# Altium PCB PCB.PcbDoc (part 2 of 2)
Units mil, origin at the board's own origin, x right, y up, seen from the top; angles counter-clockwise.
Board outline 3920 x 1470 mil, 2 copper layers (Top Layer, Bottom Layer), stack 60.433 mil thick; 97 components, 79 nets, 353 pads, 366 vias.
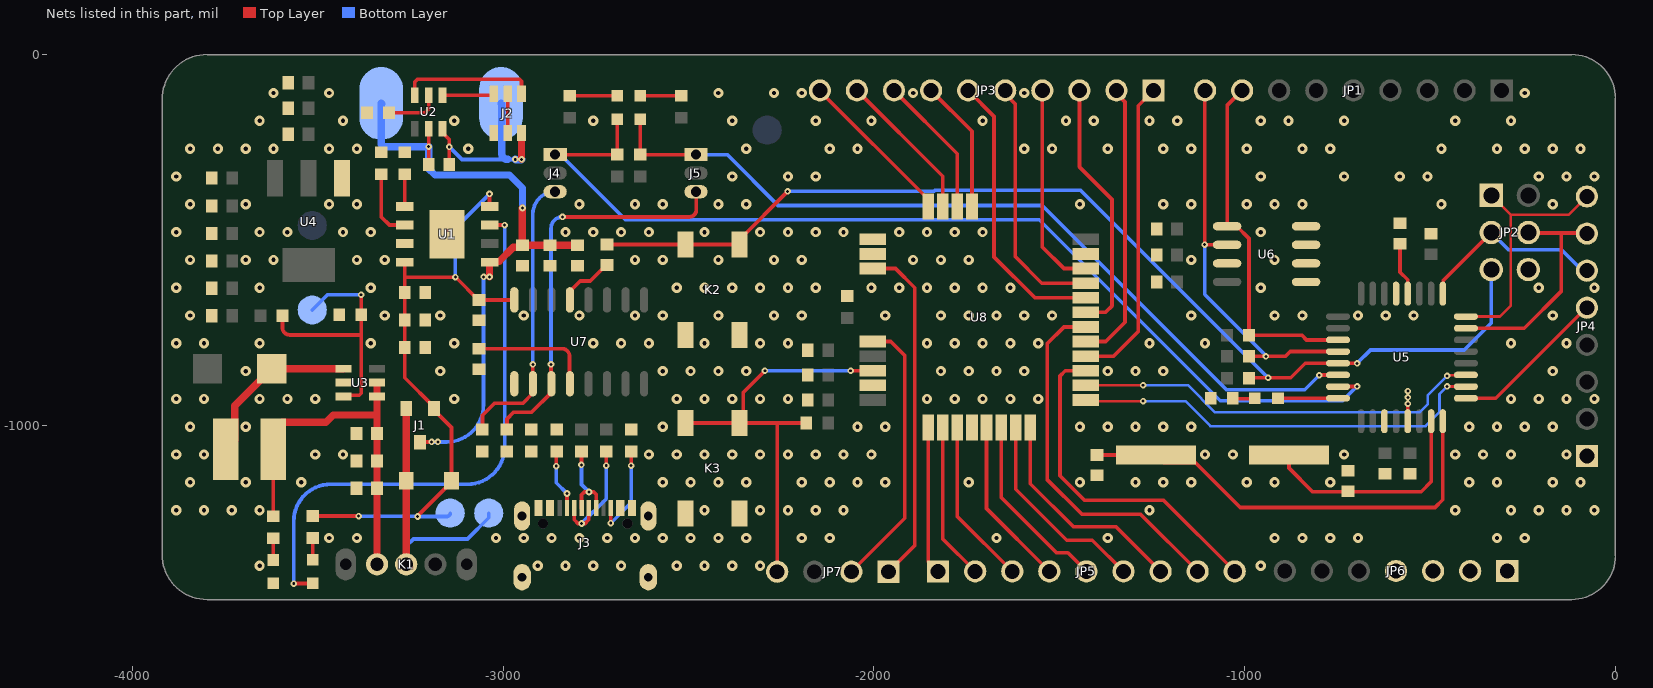
[diagram p2: the nets of this part, all layers, seen from the top]

## Via types
v1: diameter 27.56, hole 11.81, Top Layer to Bottom Layer, tented both sides, 309 vias
v2: diameter 17.72, hole 7.87, Top Layer to Bottom Layer, tented both sides, 57 vias

## Nets (pads, with @x,y where several pads share a name; then routed paths per layer and width w, separated by ;. In a path a pad name is that pad's centre, name@x,y a point inside that pad or via, vN(x,y) a via of type N, cw(c..) or ccw(c..) an arc to the next point about the centre after c; other vN are vias at no path point) (continued)
GND: C1.2 C2.2 C3.2 C4.2 C5.2 C6.2 C8.2 C9.2 C10.2 C11.2 C12.2 C13.2 C14.2 C15.2 C16.2 C17.2 C18.2 C19.2 C20.2 C21.2 C23.2 C24.2 C25.2 C26.2 C27.2 C28.2 C30.2 C31.2 C32.2 C33.2 C34.2 C35.2 D3.1 J2.1 J3.1 J3.12 J3.13 J3.14 JP2.4 JP4.1 JP6.1 JP6.2 JP6.3 JP6.4 K2.1 K2.3 K3.1 K3.3 R2.1 R3.1 R4.1 R5.1 R8.1 R9.2 R10.2 R14.2 R23.1 U1.3 U1.9 U3.2 U4.1 U5.3 U5.5 U5.21 U6.1 U6.2 U6.3 U6.4 U6.7 U7.1 U8.11 U8.17 U8.18 U8.23 U8.28 | length 48.9
  Top Layer w10: v2@-560.37,-942.14 -560.24,-942 v2(-560,-942) -560.25,-942.25 U5.5@-560.25,-989
  Bottom Layer w10: v2@-561,-941 v2(-560,-942)
  other v1: -3657,-1378.95 -2907,-1378.95 -2832,-1378.95 -2757,-1378.95 -2682,-1378.95 -2532,-1378.95 -2457,-1378.95 -2382,-1378.95 -2307,-1378.95 -957,-1378.95 -3469.5,-1303.95 -3394.5,-1303.95 -3019.5,-1303.95 -2944.5,-1303.95 -2869.5,-1303.95 -2794.5,-1303.95 -2719.5,-1303.95 -2644.5,-1303.95 -2569.5,-1303.95 -2494.5,-1303.95 -2419.5,-1303.95 -2344.5,-1303.95 -2194.5,-1303.95 -2119.5,-1303.95 -1669.5,-1303.95 -1369.5,-1303.95 -919.5,-1303.95 -844.5,-1303.95 -769.5,-1303.95 -694.5,-1303.95 -319.5,-1303.95 -244.5,-1303.95 -3882,-1228.95 -3807,-1228.95 -3732,-1228.95 -3657,-1228.95 -2457,-1228.95 -2307,-1228.95 -2232,-1228.95 -2157,-1228.95 -2082,-1228.95 -1257,-1228.95 -432,-1228.95 -282,-1228.95 -207,-1228.95 -132,-1228.95 -57,-1228.95 -3844.5,-1153.95 -3694.5,-1153.95 -3544.5,-1153.95 -2569.5,-1153.95 -2494.5,-1153.95 -2419.5,-1153.95 -2344.5,-1153.95 -2194.5,-1153.95 -2119.5,-1153.95 -2044.5,-1153.95 -1969.5,-1153.95 -1744.5,-1153.95 -1444.5,-1153.95 -1294.5,-1153.95 -1219.5,-1153.95 -1144.5,-1153.95 -994.5,-1153.95 -919.5,-1153.95 -769.5,-1153.95 -394.5,-1153.95 -319.5,-1153.95 -169.5,-1153.95 -94.5,-1153.95 -3882,-1078.95 -3807,-1078.95 -3507,-1078.95 -3432,-1078.95 -2607,-1078.95 -2532,-1078.95 -2457,-1078.95 -2382,-1078.95 -2307,-1078.95 -2232,-1078.95 -2157,-1078.95 -2082,-1078.95 -2007,-1078.95 -1107,-1078.95 -1032,-1078.95 -732,-1078.95 -432,-1078.95 -357,-1078.95 -282,-1078.95 -132,-1078.95 -3844.5,-1003.95 -3694.5,-1003.95 -2569.5,-1003.95 -2044.5,-1003.95 -1969.5,-1003.95 -1444.5,-1003.95 -1369.5,-1003.95 -1294.5,-1003.95 -1219.5,-1003.95 -1144.5,-1003.95 -394.5,-1003.95 -319.5,-1003.95 -244.5,-1003.95 -169.5,-1003.95 -3882,-928.95 -3807,-928.95 -3657,-928.95 -3582,-928.95 -3507,-928.95 -3132,-928.95 -2532,-928.95 -2457,-928.95 -2382,-928.95 -2307,-928.95 -2232,-928.95 -1857,-928.95 -1782,-928.95 -1707,-928.95 -1632,-928.95 -1557,-928.95 -282,-928.95 -207,-928.95 -132,-928.95 -57,-928.95 -3694.5,-853.95 -3169.5,-853.95 -2569.5,-853.95 -2494.5,-853.95 -2419.5,-853.95 -2344.5,-853.95 -1819.5,-853.95 -1744.5,-853.95 -1669.5,-853.95 -1594.5,-853.95 -1369.5,-853.95 -1294.5,-853.95 -1219.5,-853.95 -169.5,-853.95 -3882,-778.95 -3807,-778.95 -3657,-778.95 -3357,-778.95 -3132,-778.95 -2757,-778.95 -2682,-778.95 -2607,-778.95 -2457,-778.95 -2307,-778.95 -2232,-778.95 -1857,-778.95 -1782,-778.95 -1707,-778.95 -1632,-778.95 -1557,-778.95 -1257,-778.95 -1107,-778.95 -282,-778.95 -132,-778.95 -3844.5,-703.95 -3319.5,-703.95 -3169.5,-703.95 -2944.5,-703.95 -2794.5,-703.95 -2644.5,-703.95 -2569.5,-703.95 -2419.5,-703.95 -2269.5,-703.95 -2194.5,-703.95 -1969.5,-703.95 -1819.5,-703.95 -1744.5,-703.95 -1669.5,-703.95 -1594.5,-703.95 -1519.5,-703.95 -1144.5,-703.95 -919.5,-703.95 -844.5,-703.95 -694.5,-703.95 -619.5,-703.95 -544.5,-703.95 -169.5,-703.95 -3882,-628.95 -3657,-628.95 -3357,-628.95 -2532,-628.95 -2457,-628.95 -2382,-628.95 -2307,-628.95 -2232,-628.95 -2157,-628.95 -2007,-628.95 -1932,-628.95 -1857,-628.95 -1782,-628.95 -1707,-628.95 -1632,-628.95 -957,-628.95 -207,-628.95 -57,-628.95 -3844.5,-553.95 -3694.5,-553.95 -3619.5,-553.95 -3394.5,-553.95 -3319.5,-553.95 -2644.5,-553.95 -2569.5,-553.95 -2419.5,-553.95 -2269.5,-553.95 -2194.5,-553.95 -1894.5,-553.95 -1819.5,-553.95 -1744.5,-553.95 -1144.5,-553.95 -919.5,-553.95 -3882,-478.95 -3657,-478.95 -3582,-478.95 -3432,-478.95 -3357,-478.95 -2832,-478.95 -2757,-478.95 -2682,-478.95 -2607,-478.95 -2457,-478.95 -2307,-478.95 -2232,-478.95 -2157,-478.95 -2082,-478.95 -1932,-478.95 -1857,-478.95 -1782,-478.95 -1707,-478.95 -957,-478.95 -3844.5,-403.95 -3694.5,-403.95 -3469.5,-403.95 -3394.5,-403.95 -2794.5,-403.95 -2644.5,-403.95 -2569.5,-403.95 -2419.5,-403.95 -2344.5,-403.95 -1444.5,-403.95 -1219.5,-403.95 -1144.5,-403.95 -994.5,-403.95 -919.5,-403.95 -844.5,-403.95 -469.5,-403.95 -169.5,-403.95 -3882,-328.95 -2382,-328.95 -2232,-328.95 -2157,-328.95 -957,-328.95 -732,-328.95 -582,-328.95 -507,-328.95 -207,-328.95 -132,-328.95 -57,-328.95 -3844.5,-253.95 -3769.5,-253.95 -3694.5,-253.95 -3619.5,-253.95 -3469.5,-253.95 -3394.5,-253.95 -3094.5,-253.95 -2344.5,-253.95 -2119.5,-253.95 -2044.5,-253.95 -1594.5,-253.95 -1519.5,-253.95 -1369.5,-253.95 -1219.5,-253.95 -1144.5,-253.95 -994.5,-253.95 -844.5,-253.95 -769.5,-253.95 -469.5,-253.95 -319.5,-253.95 -244.5,-253.95 -169.5,-253.95 -94.5,-253.95 -3657,-178.95 -3432,-178.95 -3132,-178.95 -2757,-178.95 -2382,-178.95 -2157,-178.95 -2007,-178.95 -1707,-178.95 -1482,-178.95 -1407,-178.95 -1257,-178.95 -1182,-178.95 -957,-178.95 -882,-178.95 -732,-178.95 -432,-178.95 -282,-178.95 -3619.5,-103.95 -3469.5,-103.95 -2419.5,-103.95 -2269.5,-103.95 -2194.5,-103.95 -1894.5,-103.95 -1594.5,-103.95 -244.5,-103.95
  other v2: -560,-925 -560,-908
MISO: JP2.1 JP4.8 U5.16 | length 678.2
  Top Layer w7: U5.16@-403.5,-706.76 -311.88,-706.76 -283,-677.89 -283,-432 ; JP2.1@-335,-380 -283,-432 ; JP4.8@-77,-383 -126,-432 -283,-432
MOSI: JP2.5 JP4.7 U5.15 | length 614.8
  Top Layer w10: U5.15@-403.5,-738.26 -246.26,-738.26 -146,-638 -146,-481.5 ; JP2.5@-235,-480 -233.5,-481.5 -146,-481.5 ; JP4.7@-77,-483 -78.5,-481.5 -146,-481.5
NetC7_2: C7.2 J2.3 SP2.1 U2.6 | length 547.5
  Top Layer w10: U2.6@-3163.6,-200.24 -3163.6,-210.87 -3145.44,-229.02 v2(-3145.44,-249) C7.2@-3145.44,-297 ; v2@-2967.78,-283.28 v2(-2967.5,-283) ; v2@-2950.6,-283 v2(-2950.5,-283) v2@-2950,-283
  Top Layer w20: v2@-2950.6,-283 J2.3@-2950.6,-212.15
  Bottom Layer w10: v2(-3145.44,-249) -3145,-249 -3145,-249.44 -3111.44,-283 -2988,-283 v2(-2967.5,-283)
  Bottom Layer w20: SP2.1@-3006,-132 cw(c-3006,-134) -3004,-134 -3004,-267 ccw(c-2988,-267) -2988,-283 ; v2(-2967.5,-283) -2966.5,-284 -2951.5,-284 v2(-2950.5,-283)
NetC20_1: C20.1 C22.2 U5.7 | length 619.5
  Top Layer w10: C22.2@-880.75,-1080 -880.75,-1115.25 -817,-1179 -524,-1179 -497.26,-1152.26 U5.7@-497.26,-989
NetC21_1: C21.1 C22.1 U5.8 | length 1211.6
  Top Layer w10: C21.1@-1398,-1080 C22.1@-1239.25,-1080 -1218.66,-1100.59 -1133.41,-1100.59 -1012,-1222 -487,-1222 -465.76,-1200.76 U5.8@-465.76,-989
NetC23_1: C23.1 U5.20 | length 143.1
  Top Layer w10: C23.1@-581,-510.56 -581,-587 -560.31,-607.69 U5.20@-560.25,-645 U5.20@-560.2,-645.06
NetC27_1: C27.1 U7.4 | length 330.4
  Top Layer w10: C27.1@-3065,-793.44 -2841.56,-793.44 cw(c-2841.56,-814) -2821,-814 -2821,-887.09 ccw(c-2820,-887.09) U7.4@-2820,-888.09
NetC29_1: C29.1 U7.13 | length 152.7
  Top Layer w10: U7.13@-2820,-661.91 -2820,-638.58 -2792.42,-611 -2765.41,-611 -2721.97,-567.56 C29.1@-2720,-567.56
NetD1_1: D1.1 U1.7 | length 1543.1
  Top Layer w10: v2(-3565,-1427) -3514.46,-1427 ccw(c-3514.46,-1425.94) D1.1@-3513.4,-1425.94 ; U1.7@-3036.75,-460 v2(-2996,-460)
  Bottom Layer w10: v2(-3565,-1427) -3565,-1259 cw(c-3465,-1259) -3465,-1159 -3096,-1159 ccw(c-3096,-1059) -2996,-1059 v2(-2996,-460)
NetD1_2: D1.2 R1.2 | length 58.9
  Top Layer w10: D1.2@-3513.68,-1362.99 R1.2@-3513.68,-1304.12
NetD2_2: D2.2 L1.2 U3.1 | length 462.2
  Top Layer w20: L1.2@-3748.1,-1065 -3723.65,-1040.55 -3723.65,-946.86 D2.2@-3624.38,-847.6 U3.1@-3430.79,-847.6
NetD3_2: D3.2 R7.2 | length 58.9
  Top Layer w10: D3.2@-3620.14,-1363.52 R7.2@-3620.14,-1304.66
NetD5_1: D5.1 R14.1 | length 58.9
  Top Layer w10: R14.1@-1032.07,-928.25 -973.34,-928.25 D5.1@-973.2,-928.38
NetD6_2: D6.2 R16.2 | length 110.3
  Top Layer w10: D6.2@-2630.28,-111.34 R16.2@-2520,-111.34
NetD7_2: D7.2 R17.2 | length 127.3
  Top Layer w10: R17.2@-2820,-111.34 D7.2@-2692.68,-111.34
NetJ2_2: J2.2 J2.5 | length 106.3
  Top Layer w10: J2.2@-2988,-212.15 J2.5@-2988,-105.85
NetJ2_4: J2.4 U2.3 | length 362.5
  Top Layer w10: U2.3@-3238.4,-109.76 -3238.4,-74.4 -3230.4,-66.4 -2956.46,-66.4 -2950.6,-72.26 J2.4@-2950.6,-105.85
NetJ2_6: J2.6 U2.1 | length 139.8
  Top Layer w10: U2.1@-3163.6,-109.76 -3029.32,-109.76 J2.6@-3025.4,-105.85
NetJ3_4: J3.4 R10.1 | length 164.4
  Top Layer w10: v2(-2857,-1110) -2857,-1071.89 R10.1@-2855.98,-1070.88 ; J3.4@-2827.99,-1222.87 v2(-2828,-1184)
  Bottom Layer w10: v2(-2857,-1110) -2857,-1155 v2(-2828,-1184)
NetJ3_5: J3.5 J3.7 R12.1 | length 337.7
  Top Layer w10: J3.5@-2808.31,-1222.87 -2808.31,-1254.69 -2798,-1265 v2(-2788.5,-1265) -2779,-1265 -2768.94,-1254.94 J3.7@-2768.94,-1222.87 ; v2(-2722.03,-1108.85) -2722,-1111 -2721.8,-1110.8 R12.1@-2721.8,-1070.88
  Bottom Layer w10: v2(-2788.5,-1265) -2722.03,-1198.53 v2(-2722.03,-1108.85)
NetJ3_6: J3.6 J3.8 R11.1 | length 234.4
  Top Layer w10: v2(-2789,-1107) -2788.73,-1106.73 R11.1@-2788.73,-1070.88 ; J3.6@-2788.62,-1222.87 -2788.62,-1187.62 -2781,-1180 v2(-2768.5,-1180) -2756,-1180 -2749.26,-1186.74 J3.8@-2749.26,-1222.87
  Bottom Layer w10: v2(-2789,-1107) -2789,-1159.5 v2(-2768.5,-1180)
NetJ3_10: J3.10 R9.1 | length 257.1
  Top Layer w10: v2(-2710,-1264) -2710,-1261 -2709.89,-1260.89 J3.10@-2709.89,-1222.87 ; v2(-2655,-1109) -2655,-1071.01 R9.1@-2654.87,-1070.88
  Bottom Layer w10: v2(-2710,-1264) -2655,-1209 v2(-2655,-1109)
NetR2_2: R2.2 U1.2 | length 187.4
  Top Layer w10: R2.2@-3328.8,-322.88 -3328.8,-438.2 -3307,-460 U1.2@-3265.75,-460
NetR4_2: R4.2 U1.1 | length 87
  Top Layer w10: R4.2@-3265.99,-323.09 -3265.75,-323.34 U1.1@-3265.75,-410
NetR5_2: R5.2 U2.2 | length 148.7
  Top Layer w10: R5.2@-3308.34,-157 -3211,-157 -3201,-147 U2.2@-3201,-109.76
NetR6_1: R6.1 R8.2 TP3.1 U3.3 | length 721.6
  Top Layer w10: R6.1@-3595.34,-704.46 -3595.34,-736.66 ccw(c-3575.66,-736.66) -3575.66,-756.34 -3383,-756.34 ; U3.3@-3430.79,-922.4 -3427.59,-919.2 -3388.86,-919.2 -3383,-913.34 -3383,-756.34 ; v2(-3383,-648) R8.2@-3383,-702 -3383,-756.34
  Bottom Layer w10: TP3.1@-3515,-689 -3474,-648 v2(-3383,-648)
PA0: JP5.4 U8.29 | length 458.2
  Top Layer w10: U8.29@-1696.31,-1005.98 -1696.31,-1224.69 JP5.4@-1527,-1394
PA1: JP5.8 U8.6 | length 997.4
  Top Layer w10: U8.6@-1429.09,-734.78 -1487.77,-734.78 -1533,-780 -1533,-1146 -1439,-1240 -1281,-1240 JP5.8@-1127,-1394
PA8: JP7.1 U8.19 | length 929.7
  Top Layer w10: U8.19@-2002.91,-577.3 -1941.7,-577.3 -1890,-629 -1890,-1324 JP7.1@-1961,-1395
PA9: JP7.2 U8.20 | length 744.2
  Top Layer w10: JP7.2@-2061,-1395 -1917,-1251 -1917,-812 -1954.85,-774.15 U8.20@-2002.91,-774.15
PA10: JP5.1 U8.25 | length 399.1
  Top Layer w10: U8.25@-1853.79,-1005.98 -1853.79,-1367.21 JP5.1@-1827,-1394
PA15: JP5.9 U8.3 | length 921.6
  Top Layer w10: U8.3@-1429.09,-852.89 -1483.89,-852.89 -1498,-867 -1498,-1136 -1432,-1202 -1219,-1202 JP5.9@-1027,-1394
PB2: JP5.2 U8.26 | length 424.2
  Top Layer w10: U8.26@-1814.42,-1005.98 -1814.42,-1306.58 JP5.2@-1727,-1394
PB3: JP5.7 U8.32 | length 600.9
  Top Layer w10: U8.32@-1578.2,-1005.98 -1578.2,-1157.8 -1462,-1274 -1347,-1274 JP5.7@-1227,-1394
PB4: JP5.6 U8.31 | length 548.8
  Top Layer w10: U8.31@-1617.57,-1005.98 -1617.57,-1172.43 -1480,-1310 -1411,-1310 JP5.6@-1327,-1394
PB5: JP5.5 U8.30 | length 501.4
  Top Layer w10: U8.30@-1656.94,-1005.98 -1656.94,-1195.06 -1508,-1344 -1477,-1344 JP5.5@-1427,-1394
PB12: JP5.3 U8.27 | length 449.3
  Top Layer w10: U8.27@-1775.05,-1005.98 -1775.05,-1245.95 JP5.3@-1627,-1394
RESET: C29.2 JP2.3 K2.2 K2.4 R18.1 U5.29 | length 2920.3
  Top Layer w10: C29.2@-2720,-512.44 K2.2@-2507.84,-512.44 K2.4@-2362.16,-512.44 -2362.16,-498.66 -2233,-369.5 v2(-2233,-369) ; R18.1@-988.18,-872.78 -987.15,-871.75 v2(-937,-871.75) -875.75,-871.75 -837,-833 v2(-697,-833)
  Bottom Layer w10: v2(-2233,-369) -1838.33,-369 -1835.33,-366 -1442.75,-366 v2(-937,-871.75) ; v2(-697,-833) -661,-797 -408.11,-797 -335,-723.89 JP2.3@-335,-580
RESET_RAK3172: JP7.4 K3.2 K3.4 R24.1 U8.22 | length 1172.7
  Top Layer w10: K3.2@-2497.84,-994 K3.4@-2352.16,-994 ; v2(-2294,-853) -2352.16,-911.16 K3.4@-2352.16,-994 ; JP7.4@-2261,-1395 -2261,-995 -2260,-994 ; R24.1@-2182.76,-994 -2260,-994 ; v2(-2063,-853) -2062.89,-852.89 U8.22@-2002.91,-852.89 ; K3.4@-2352.16,-994 -2260,-994
  Bottom Layer w10: v2(-2294,-853) v2(-2063,-853)
RESET_TFT: JP4.5 U5.9 | length 427.7
  Top Layer w10: U5.9@-403.5,-927.24 -323.24,-927.24 -79,-683 JP4.5@-77,-683
RXD_HV: J5.3 R21.2 U7.3 | length 1091.1
  Top Layer w10: R21.2@-2990,-1011.34 -2990,-983 -2972,-965 -2923.58,-965 -2870,-911.42 U7.3@-2870,-888.09 cw(c-2870,-887.09) -2871,-887.09 v2(-2871,-836) ; v2(-2840,-438) -2498,-438 ccw(c-2498,-419) -2479,-419 -2479,-371 ccw(c-2480,-371) J5.3@-2480,-370
  Bottom Layer w10: v2(-2871,-836) -2871,-469 cw(c-2840,-469) v2(-2840,-438)
RXD_LV: D7.1 J4.1 R20.2 U5.31 | length 2769.3
  Top Layer w10: J4.1@-2860,-270 R20.2@-2692.41,-270 D7.1@-2692.41,-174.29 ; U5.31@-748.5,-895.74 -748.13,-895.37 -697.37,-895.37 v2(-697,-895)
  Bottom Layer w10: J4.1@-2860,-270 -2846.22,-270 -2670.22,-446 -1554,-446 -1066,-934 -736,-934 v2(-697,-895)
RXD_RAK3172: U5.10 U8.1 | length 1128.3
  Top Layer w7: U8.1@-1429.09,-931.62 -1425.72,-935 v2(-1274,-935) ; v2(-454,-895) -453.63,-895.37 -403.87,-895.37 U5.10@-403.5,-895.74
  Bottom Layer w7: v2(-1274,-935) -1159.61,-935 -1092.2,-1002.4 -512.56,-1002.4 -474.62,-964.47 -474.62,-915.62 v2(-454,-895)
S1_MISO_RAK: JP3.8 U8.14 | length 383.8
  Top Layer w10: JP3.8@-1945.91,-97.02 -1775.06,-267.88 U8.14@-1775.06,-410.02
S1_MOSI_RAK: JP3.7 U8.13 | length 358.7
  Top Layer w10: JP3.7@-1845.91,-97.02 -1735.69,-207.25 U8.13@-1735.69,-410.02
S1_NSS_RAK: JP3.10 U8.16 | length 434
  Top Layer w10: JP3.10@-2145.91,-97.02 -2145.91,-98.22 -1853.8,-390.34 U8.16@-1853.8,-410.02
S1_SCK_RAK: JP3.9 U8.15 | length 408.9
  Top Layer w10: JP3.9@-2045.91,-97.02 -1814.43,-328.51 U8.15@-1814.43,-410.02
SCK: JP2.2 JP4.6 U5.17 | length 504.8
  Top Layer w10: U5.17@-465.76,-630 -464.29,-628.52 -464.29,-609.29 JP2.2@-335,-480
  Bottom Layer w10: JP2.2@-335,-480 -288,-527 -145,-527 -89,-583 JP4.6@-77,-583
SCL: JP1.9 R13.2 U5.28 U6.6 | length 1092.4
  Top Layer w10: JP1.9@-1107,-97 -1107.5,-97.5 -1107.5,-512.5 v2(-1108,-513) -1107.59,-513.41 U6.6@-1047.5,-513.41 ; R13.2@-988.18,-813.78 -942.76,-813.78 -889.78,-813.78 -877.25,-801.25 U5.28@-748.5,-801.25
  Bottom Layer w10: v2(-1108,-513) -1108,-647 -942.76,-812.24 v2(-942.76,-814.27) ; JP1.9@-1107.5,-97.5 JP1.9@-1107,-97
SCL_RAK: JP3.5 U8.9 | length 678.7
  Top Layer w10: JP3.5@-1645.91,-97.02 -1645.91,-106.72 -1619,-133.64 -1619,-545 -1547.34,-616.66 U8.9@-1429.09,-616.66
SDA: JP1.8 R15.2 U5.27 U6.5 | length 961.6
  Top Layer w10: JP1.8@-1007,-97 -1047.5,-137.5 U6.5@-1047.5,-463.41 -1021.59,-463.41 -988.73,-496.27 -988.73,-756.68 R15.2@-988.18,-757.23 -845.77,-757.23 -833.24,-769.76 U5.27@-748.5,-769.76
SDA_RAK: JP3.4 U8.10 | length 563
  Top Layer w10: JP3.4@-1545.91,-97.02 -1545.91,-519.09 -1487.7,-577.3 U8.10@-1429.09,-577.3
SWCLK_RAK: JP3.6 U8.8 | length 770.4
  Top Layer w10: JP3.6@-1745.91,-97.02 -1676,-166.94 -1676,-546 -1565.97,-656.03 U8.8@-1429.09,-656.03
SWDIO_RAK: JP3.3 U8.7 | length 695.7
  Top Layer w10: JP3.3@-1445.91,-97.02 -1445.91,-303.09 -1358,-391 -1358,-678 -1375.4,-695.41 U8.7@-1429.09,-695.41
"TOGGLE LED": D5.2 U5.32 | length 161.8
  Top Layer w10: D5.2@-910.25,-927.24 U5.32@-748.5,-927.24
TXD_HV: J4.3 R19.2 U7.2 | length 776.8
  Top Layer w10: R19.2@-3056,-1011.34 -3056,-973 -3024,-941 -2947.42,-941 -2920,-913.58 U7.2@-2920,-888.09 v2(-2920,-836)
  Bottom Layer w10: v2(-2920,-836) -2920,-430 cw(c-2860,-430) J4.3@-2860,-370
TXD_LV: D6.1 J5.1 R22.2 U5.30 | length 2256.3
  Top Layer w10: D6.1@-2630,-174.29 R22.2@-2630,-270 J5.1@-2480,-270 ; v2(-799,-865) -798.62,-864.62 -748.88,-864.62 U5.30@-748.5,-864.24
  Bottom Layer w10: J5.1@-2480,-270 -2396,-270 -2259,-407 -1546,-407 -1049,-904 -838,-904 v2(-799,-865)
TXD_RAK3172: U5.11 U8.2 | length 1111.9
  Top Layer w7: U8.2@-1429.09,-892.26 -1274.26,-892.26 v2(-1274,-892) ; v2(-454,-866.86) -452.69,-865.55 -404.81,-865.55 U5.11@-403.5,-864.24
  Bottom Layer w7: v2(-1274,-892) -1153,-892 -1079.62,-965.38 -528.76,-965.38 -506.12,-942.74 -506.12,-918.98 v2(-454,-866.86)
U1_TXD_RAK: JP3.1 U8.4 | length 836.6
  Top Layer w10: U8.4@-1429.09,-813.51 -1353.52,-813.51 -1287,-747 -1287,-138.11 JP3.1@-1245.91,-97.02
U2_RXD_RAK: JP3.2 U8.5 | length 762.2
  Top Layer w10: U8.5@-1429.09,-774.14 -1375.15,-774.14 -1323,-722 -1323,-127.8 -1345.91,-104.89 JP3.2@-1345.91,-97.02
V-BAT: C4.1 C5.1 C6.1 C7.1 J1.3 SP1.1 U1.5 U2.5 | length 1697.8
  Top Layer w10: J1.3@-3224.17,-1045.28 -3193.28,-1045.28 v2(-3193,-1045) ; U2.5@-3201,-200.24 v2(-3201,-248.4) -3201,-296.56 C7.1@-3200.56,-297
  Top Layer w20: v2(-3037,-600) -3037,-560.25 -3034.94,-558.19 -3011.19,-558.19 -2973,-520 -2953.87,-520 C4.1@-2948.12,-514.25 ; v2(-2948,-414) -2948.12,-414.12 C4.1@-2948.12,-514.25 ; C6.1@-2800.07,-514.25 C5.1@-2874.21,-514.25 C4.1@-2948.12,-514.25
  Bottom Layer w10: v2(-3193,-1045) -3192,-1046 -3177,-1046 v2(-3176,-1045) -3153,-1045 ccw(c-3153,-945) -3053,-945 v2(-3053,-600)
  Bottom Layer w20: SP1.1@-3328,-133 ccw(c-3329,-133) SP1.1@-3329,-132 -3329,-242.54 -3323.14,-248.4 v2(-3201,-248.4) -3201,-307.97 -3184.03,-324.94 -2983.06,-324.94 -2948,-360 v2(-2948,-414)
V-BUCKBOOST: C11.1 C12.1 C13.1 K1.1 L1.1 R7.1 U3.4 U3.5 | length 1016.8
  Top Layer w10: R7.1@-3620.14,-1245.34 L1.1@-3620.14,-1065
  Top Layer w20: L1.1@-3620.14,-1065 -3620.14,-1016.77 -3595.69,-992.32 -3478.03,-992.32 -3457.98,-972.28 -3340.31,-972.28 ; K1.1@-3340.31,-1375 C13.1@-3340.31,-1169.97 C12.1@-3340.31,-1096.06 C11.1@-3340.31,-1022.15 -3340.31,-972.28 ; U3.5@-3340.31,-885 U3.4@-3340.31,-922.4 -3340.31,-972.28
V-BUS: C1.1 C2.1 C3.1 C28.1 D4.2 J1.1 J3.2 J3.11 R1.1 R3.2 R19.1 R21.1 TP5.1 U1.4 U1.8 U7.16 | length 1769.1
  Top Layer w10: R1.1@-3513.68,-1244.8 -3398.2,-1244.8 -3398,-1245 v2(-3390,-1245) ; U1.4@-3265.75,-560 -3265.75,-601.01 ; v2(-3231,-1246) -3231,-1244.78 -3139.53,-1153.31 D4.2@-3139.53,-1149.37 -3139.53,-1005.9 -3186.77,-958.66 J1.1@-3186.77,-954.72 -3186.77,-950.79 -3265.75,-871.81 C3.1@-3265.75,-789.85 C2.1@-3265.75,-715.94 C1.1@-3265.75,-642.03 -3265.75,-601.01 ; v2@-3128.95,-601.01 -3265.75,-601.01 ; v2@-3127.86,-601.01 -3066.97,-661.91 C28.1@-3065,-661.91 U7.16@-2970,-661.91 ; v2(-3037,-376) -3037,-379 -3036.75,-379.25 U1.8@-3036.75,-410
  Bottom Layer w10: v2(-3390,-1245) -3389.5,-1245.5 -3231.5,-1245.5 v2(-3231,-1246) -3152,-1246 ccw(c-3152,-1237) TP5.1@-3143,-1237 ; v2(-3128.95,-600.57) -3128.95,-467.95 v2(-3037,-376)
VCC: D4.1 J1.2 K1.2 TP1.1 | length 735.7
  Top Layer w20: K1.2@-3261.57,-1375 D4.1@-3261.57,-1149.37 J1.2@-3261.57,-954.72
  Bottom Layer w10: K1.2@-3261.57,-1375 -3261.57,-1326.57 -3241.68,-1306.68 -3096.17,-1306.68 -3039,-1249.51 TP1.1@-3039,-1237
pads on no net: J3. J3.3 J3.9 K1.3 K1.4 K1.5 U1.6 U2.4 U3.6 U4.4 U5.12 U5.13 U7.7 U7.8 U7.9 U7.10 U7.11 U7.12 U7.14 U7.15 U8.12

## Polygon pours and split planes (outlines as drawn)
GND on Top Layer "GND_L01_P063" (solid, pour order 63): -3920,-1348.7 ccw(c-3798.7,-1348.7) -3798.7,-1470 -118.5,-1470 ccw(c-118.5,-1351.5) 0,-1351.5 0,-118.5 ccw(c-118.5,-118.5) -118.5,0 -3798.44,0 ccw(c-3798.44,-121.56) -3920,-121.56
GND on Top Layer "NONET_L01_P027" (solid, shelved, pour order 27): -4160,-1347.21 -4160,-206.17 cw(c-4042.83,-206.17) -4042.83,-89 -342.48,-89 cw(c-342.48,-208.48) -223,-208.48 -223,-1348.74 cw(c-341.21,-1348.74) -341.21,-1466.95 -4040.26,-1466.95 cw(c-4040.26,-1347.21)
GND on Bottom Layer "GND_L02_P062" (solid, pour order 62): -3920,-1348.7 ccw(c-3798.7,-1348.7) -3798.7,-1470 -118.5,-1470 ccw(c-118.5,-1351.5) 0,-1351.5 0,-118.5 ccw(c-118.5,-118.5) -118.5,0 -3798.44,0 ccw(c-3798.44,-121.56) -3920,-121.56

## Keep-outs
Keep-Out Layer:
  circle w10: c-118.11,-1351.89 r62.99
  circle w10: c-118.11,-118.11 r62.99
  circle w10: c-3801.89,-118.11 r62.99
  circle w10: c-3801.89,-1351.89 r62.99
  pour cut-out: -220.47,-118.11 ccw(c-118.11,-118.11) -118.11,-220.47 ccw(c-118.11,-118.11) -15.75,-118.11 ccw(c-118.11,-118.11) -118.11,-15.75 ccw(c-118.11,-118.11)
  pour cut-out: -3801.89,-220.47 cw(c-3801.89,-118.11) -3904.25,-118.11 cw(c-3801.89,-118.11) -3801.89,-15.75 cw(c-3801.89,-118.11) -3699.53,-118.11 cw(c-3801.89,-118.11)
  pour cut-out: -3904.25,-1351.89 ccw(c-3801.89,-1351.89) -3801.89,-1454.25 ccw(c-3801.89,-1351.89) -3699.53,-1351.89 ccw(c-3801.89,-1351.89) -3801.89,-1249.53 ccw(c-3801.89,-1351.89)
  pour cut-out: -220.47,-1351.89 ccw(c-118.11,-1351.89) -118.11,-1454.25 ccw(c-118.11,-1351.89) -15.75,-1351.89 ccw(c-118.11,-1351.89) -118.11,-1249.53 ccw(c-118.11,-1351.89)
  lines w10: -3920,-1348.7 ccw(c-3798.7,-1348.7) -3798.7,-1470 -229,-1470 -118.5,-1470 ccw(c-118.5,-1351.5) 0,-1351.5 0,-118.5 ccw(c-118.5,-118.5) -118.5,0 -3798.44,0 ccw(c-3798.44,-121.56) -3920,-121.56 -3920,-1348.7

## Other copper
Top Layer:
  region net +3.3: -437.5,-310.5 -455.5,-310.5 cw(c-455.5,-301.5) -464.5,-301.5 cw(c-455.5,-301.5) -455.5,-292.5 -437.5,-292.5 cw(c-437.5,-301.5) -428.5,-301.5 cw(c-437.5,-301.5)
  region net GND: -569.1,-908.28 cw(c-560.1,-908.28) -560.1,-899.28 cw(c-560.1,-908.28) -551.1,-908.28 -551.1,-942.28 cw(c-560.1,-942.28) -560.1,-951.28 cw(c-560.1,-942.28) -569.1,-942.28
  region net +3.3: -1174,-1138.5 -1174,-1156.5 cw(c-1183,-1156.5) -1183,-1165.5 cw(c-1183,-1156.5) -1192,-1156.5 -1192,-1138.5 cw(c-1183,-1138.5) -1183,-1129.5 cw(c-1183,-1138.5)
  region net +3.3: -1192,-1017 -1192,-999 cw(c-1183,-999) -1183,-990 cw(c-1183,-999) -1174,-999 -1174,-1017 cw(c-1183,-1017) -1183,-1026 cw(c-1183,-1017)
  region net +3.3: -1190.94,-292 -1173.94,-292 cw(c-1173.94,-301) -1164.94,-301 -1164.94,-302 cw(c-1172.94,-302) -1172.94,-310 -1190.94,-310 cw(c-1190.94,-301) -1199.94,-301 cw(c-1190.94,-301)
  region net +3.3: -2124.5,-293 -2107.5,-293 cw(c-2107.5,-302) -2098.5,-302 -2098.5,-303 cw(c-2106.5,-303) -2106.5,-311 -2124.5,-311 cw(c-2124.5,-302) -2133.5,-302 cw(c-2124.5,-302)
  region net NetC7_2: -2967.5,-274 -2950.5,-274 cw(c-2950.5,-283) -2941.5,-283 -2941.5,-284 cw(c-2949.5,-284) -2949.5,-292 -2967.5,-292 cw(c-2967.5,-283) -2976.5,-283 cw(c-2967.5,-283)
  region net V-BAT: -3054,-591 -3037,-591 cw(c-3037,-600) -3028,-600 -3028,-601 cw(c-3036,-601) -3036,-609 -3054,-609 cw(c-3054,-600) -3063,-600 cw(c-3054,-600)
  region net V-BAT: -3193,-1036 -3176,-1036 cw(c-3176,-1045) -3167,-1045 -3167,-1046 cw(c-3175,-1046) -3175,-1054 -3193,-1054 cw(c-3193,-1045) -3202,-1045 cw(c-3193,-1045)
  region net V-BUS: -3159.21,-1172.39 -2902.61,-1172.39 -2885,-1190 -2885.08,-1190.08 -2885.08,-1244.52 -2861.46,-1244.52 -2861.46,-1189.46 -2838,-1166 -2718,-1166 -2696,-1188 -2696.1,-1188.1 -2696.1,-1244.52 -2672.48,-1244.52 -2673,-1244 -2673,-1167 -2704,-1136 -2879,-1136 -2907.27,-1107.73 -2907.27,-1054.58 -3071.75,-1054.58 -3072.73,-1055.57 -3072,-1056.3 -3072,-1113 -3084.75,-1125.75 -3159.21,-1125.75
Bottom Layer:
  pour cut-out: -675.06,-957.73 -677.13,-955.66 -677.13,-946.11 -585.2,-854.18 -467.99,-854.18 -465.75,-856.42 -465.75,-867.51 -513.18,-914.94 -513.18,-938.99 -531.92,-957.73
  region net +3.3: -437.5,-310.5 -455.5,-310.5 cw(c-455.5,-301.5) -464.5,-301.5 cw(c-455.5,-301.5) -455.5,-292.5 -437.5,-292.5 cw(c-437.5,-301.5) -428.5,-301.5 cw(c-437.5,-301.5)
  region net GND: -569,-908 cw(c-560,-908) -560,-899 cw(c-560,-908) -551,-908 -551,-942 cw(c-560,-942) -560,-951 cw(c-560,-942) -569,-942
  region net +3.3: -1174,-1138.5 -1174,-1156.5 cw(c-1183,-1156.5) -1183,-1165.5 cw(c-1183,-1156.5) -1192,-1156.5 -1192,-1138.5 cw(c-1183,-1138.5) -1183,-1129.5 cw(c-1183,-1138.5)
  region net +3.3: -1192,-1017 -1192,-999 cw(c-1183,-999) -1183,-990 cw(c-1183,-999) -1174,-999 -1174,-1017 cw(c-1183,-1017) -1183,-1026 cw(c-1183,-1017)
  region net +3.3: -1190.94,-292 -1173.94,-292 cw(c-1173.94,-301) -1164.94,-301 -1164.94,-302 cw(c-1172.94,-302) -1172.94,-310 -1190.94,-310 cw(c-1190.94,-301) -1199.94,-301 cw(c-1190.94,-301)
  region net +3.3: -2124.5,-293 -2107.5,-293 cw(c-2107.5,-302) -2098.5,-302 -2098.5,-303 cw(c-2106.5,-303) -2106.5,-311 -2124.5,-311 cw(c-2124.5,-302) -2133.5,-302 cw(c-2124.5,-302)
  region net NetC7_2: -2967.5,-274 -2950.5,-274 cw(c-2950.5,-283) -2941.5,-283 -2941.5,-284 cw(c-2949.5,-284) -2949.5,-292 -2967.5,-292 cw(c-2967.5,-283) -2976.5,-283 cw(c-2967.5,-283)
  region net V-BAT: -3054,-591 -3037,-591 cw(c-3037,-600) -3028,-600 -3028,-601 cw(c-3036,-601) -3036,-609 -3054,-609 cw(c-3054,-600) -3063,-600 cw(c-3054,-600)
  region net V-BAT: -3193,-1036 -3176,-1036 cw(c-3176,-1045) -3167,-1045 -3167,-1046 cw(c-3175,-1046) -3175,-1054 -3193,-1054 cw(c-3193,-1045) -3202,-1045 cw(c-3193,-1045)

## Silkscreen, mask and mechanical layers (free items; w line width, h text height)
Top Overlay:
  text "A2" at -886.23,-223.97 h40 r90
  text "A3" at -786.23,-223.97 h40 r90
  text "A4" at -686.23,-223.97 h40 r90
  text "A5" at -586.23,-223.97 h40 r90
  text "A6" at -486.23,-223.97 h40 r90
  text "A7" at -386.23,-223.97 h40 r90
  text "SCL" at -1088.31,-243.97 h40 r90
  text "SDA" at -987.31,-248.97 h40 r90
  text "D10" at -286.23,-259.52 h40 r90
  text "PA4" at -2126.23,-288.08 h40 r90
  text "PA5" at -2026.23,-288.08 h40 r90
  text "PA6" at -1926.23,-288.08 h40 r90
  text "PA7" at -1826.23,-288.08 h40 r90
  text "PA14" at -1726.23,-288.08 h40 r90
  text "PA12" at -1626.23,-288.08 h40 r90
  text "PA11" at -1526.23,-288.08 h40 r90
  text "PA13" at -1426.23,-288.08 h40 r90
  text "PA7" at -1326.23,-288.08 h40 r90
  text "PA6" at -1226.23,-288.08 h40 r90
  text "+3.3" at -1472.18,-687.09 h40
  text "ICSP" at -336.65,-702.98 h40
  text "RESET ATM" at -2277.48,-741.53 h40 r90
  text "SDA" at -1476.37,-787.09 h40
  text "SCL" at -1472.18,-887.09 h40
  text "GND" at -1483.99,-987.09 h40
  text "SPI_TFT" at -151.5,-1070.01 h40 r90
  text "RESET RAK" at -2277.48,-1218.06 h40 r90
  text "PA10" at -1807.54,-1319.02 h40 r90
  text "PB2" at -1700.54,-1319.02 h40 r90
  text "PA12" at -1600.54,-1319.02 h40 r90
  text "PA0" at -1500.54,-1319.02 h40 r90
  text "PB5" at -1400.54,-1319.02 h40 r90
  text "PB4" at -1300.54,-1319.02 h40 r90
  text "PB3" at -1200.54,-1319.02 h40 r90
  text "PA1" at -1100.54,-1319.02 h40 r90
  text "PA15" at -1000.54,-1319.02 h40 r90
  text "+3.3V" at -874.31,-1319.02 h40 r90
  text "+3.3V" at -772.31,-1319.02 h40 r90
  text "+3.3V" at -672.31,-1319.02 h40 r90
  text "GND" at -572.31,-1319.02 h40 r90
  text "GND" at -472.31,-1319.02 h40 r90
  text "GND" at -373.31,-1319.02 h40 r90
  text "GND" at -273.31,-1319.02 h40 r90
  text "PA8" at -2246.07,-1331.53 h40 r90
  text "PA9" at -2146.07,-1331.53 h40 r90
  text "BOOT" at -2046.07,-1331.53 h40 r90
  text "RESET" at -1946.07,-1331.53 h40 r90
Bottom Overlay:
  lines w10: -190,-1156 -190,-682 -144,-636 -144,-328 ; -813.49,-630 -813.49,-330 -185,-330 -185,-630 -813.49,-630
  text "+3.3V" at -2258,-262 h60 r90
  text "BAT -" at -3287.56,-263.11 h100 r90
  text "BAT +" at -2962.56,-263.11 h100 r90
  text "MISO" at -604,-443 h60
  text "+3.3V" at -424,-443 h60
  text "+5V" at -3575,-492 h60
  text "SCK" at -604,-503 h60
  text "MOSI" at -424,-503 h60
  text "RESET" at -604,-563 h60
  text "GND" at -424,-563 h60
  text "FB" at -3575,-719 h60
  text "MISO" at -202,-739 h60
  text "MOSI" at -202,-799 h60
  text "SCK" at -202,-859 h60
  text "RESET" at -202,-919 h60
  text "DC" at -202,-979 h60
  text "V BUS" at -3111,-988 h60 r90
  text "CS" at -202,-1039 h60
  text "VCC" at -3010,-1053 h60 r90
  text "+3.3V" at -202,-1099 h60
  text "GND" at -202,-1159 h60